# Altium PCB mainPCB.PcbDoc
Units mil, origin at the board's own origin, x right, y up, seen from the top; angles counter-clockwise.
Board outline 4245 x 925 mil, 4 copper layers (Top Layer, GND, Power, Bottom Layer), stack 23.756 mil thick; 69 components, 45 nets, 283 pads, 120 vias.
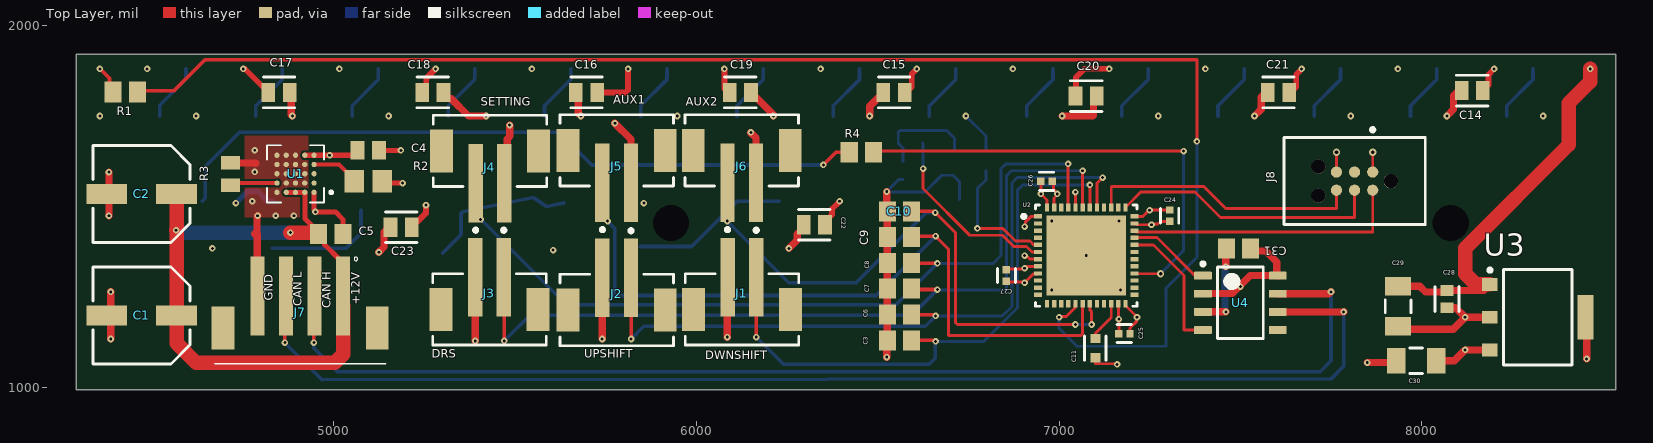
[diagram p0: Top Layer view]
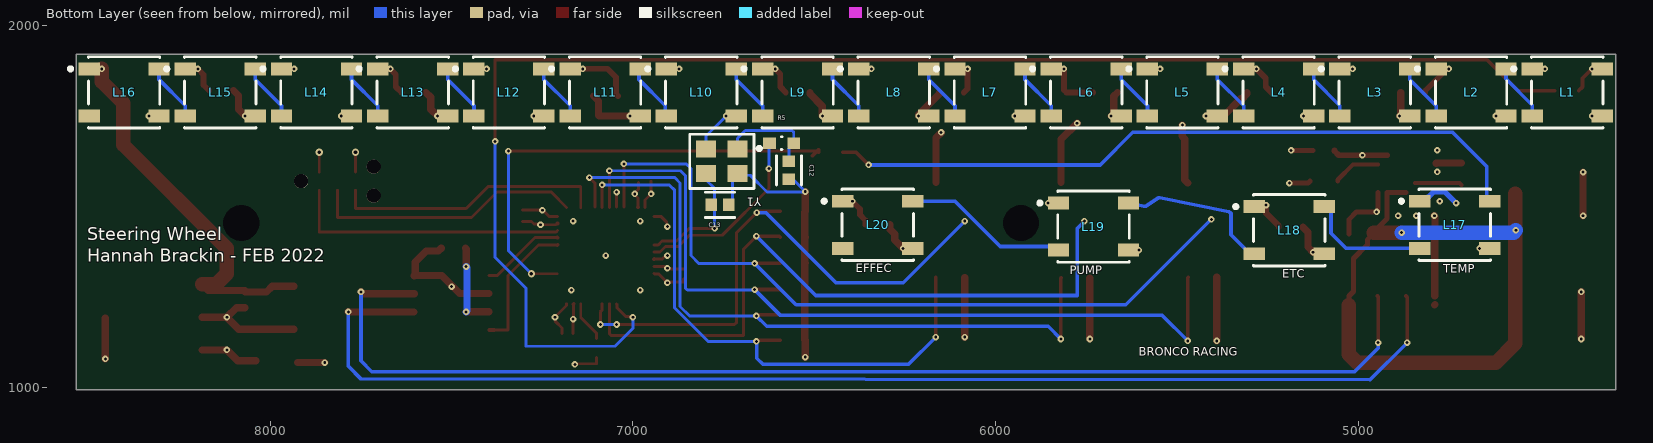
[diagram p1: Bottom Layer view, seen from below]
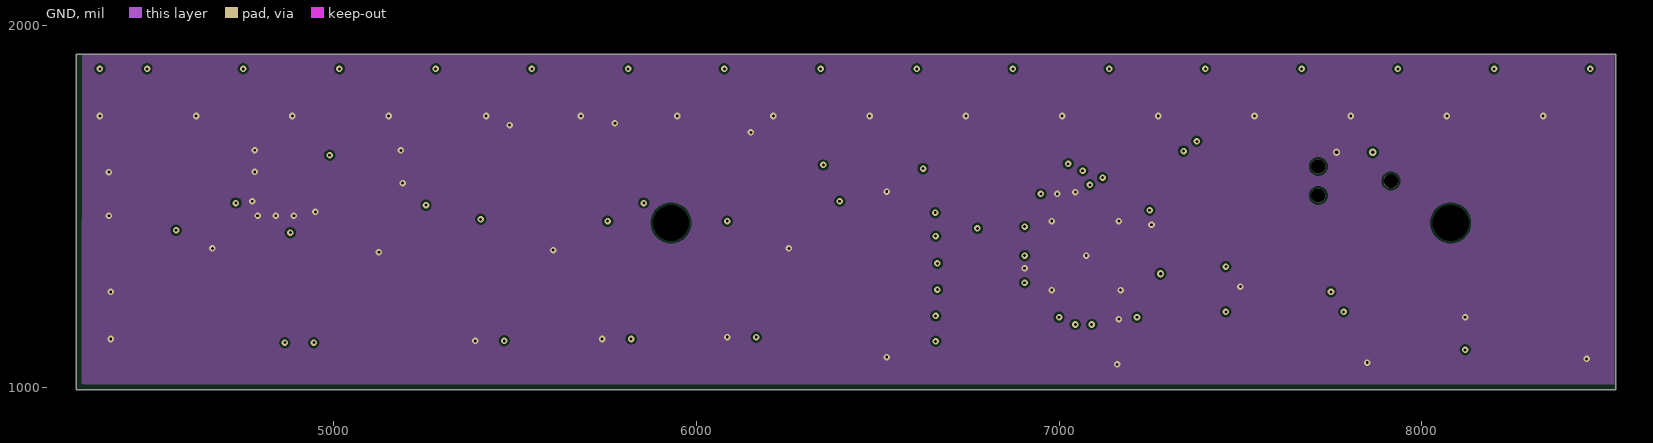
[diagram p2: GND]
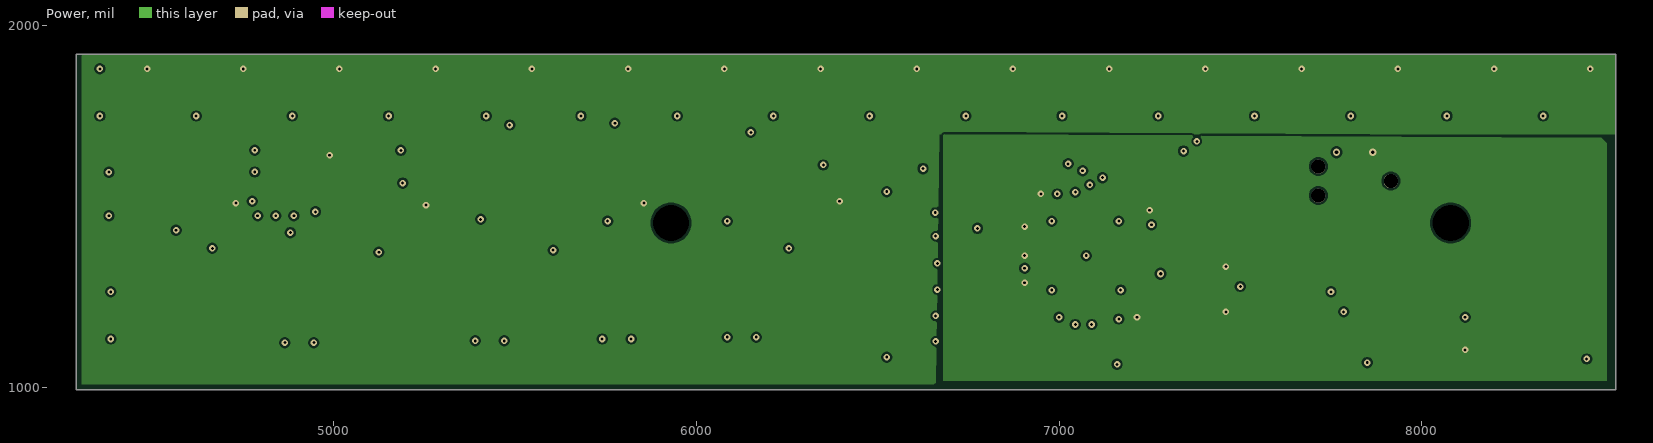
[diagram p3: Power]
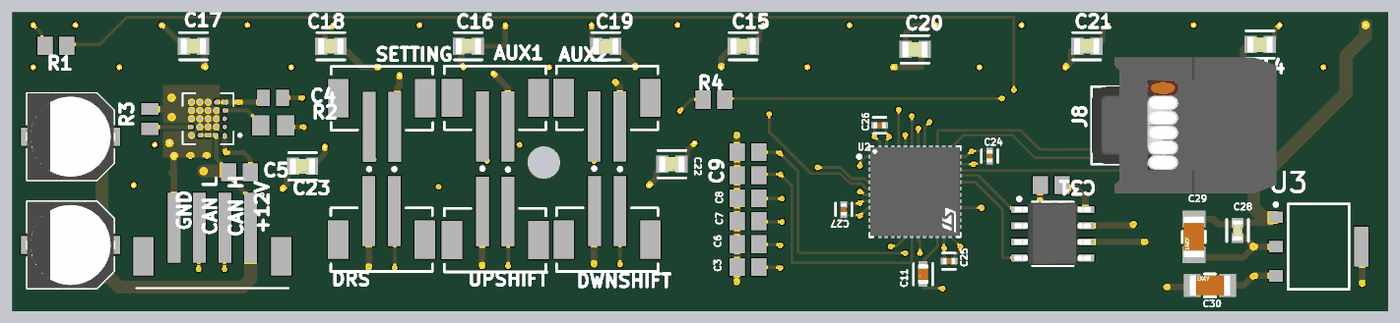
[diagram p4: 3D render of the assembled board from above, using the file's embedded part models]
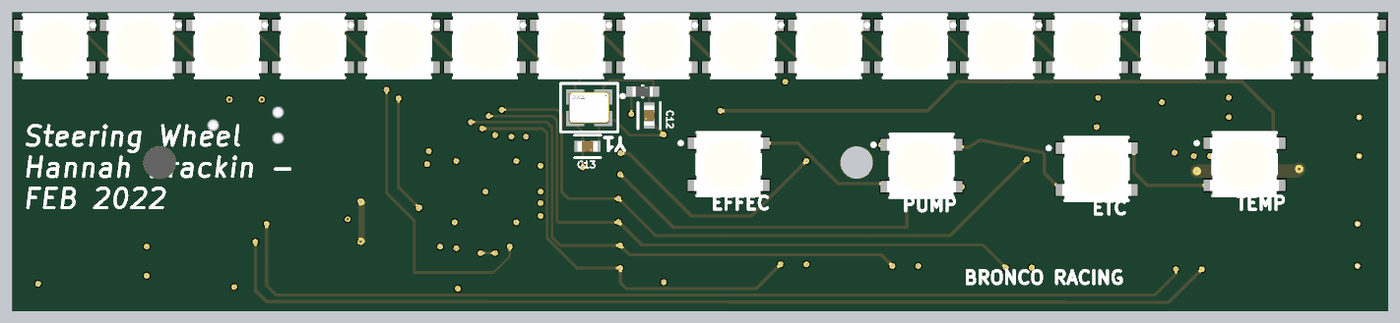
[diagram p5: 3D render of the assembled board from below, using the file's embedded part models]

## Layer stack, top to bottom
Top Solder: solder mask 0.4, Solder Resist, Dk 3.5
Top Layer: signal copper 1.4
Dielectric 2: prepreg 2.8, PP-006, Dk 4.1
GND: signal copper 1.378
Dielectric 1: dielectric 12.6, FR-4, Dk 4.8
Power: signal copper 1.378
Dielectric 3: prepreg 2.8, PP-006, Dk 4.1
Bottom Layer: signal copper 1.4
Bottom Solder: solder mask 0.4, Solder Resist, Dk 3.5

## Board outline
6805,995 8535,995 8535,1705 8535,1920 4290,1920 4290,1710 4290,995

## Design rules (kind name [scope] priority, off if disabled: settings)
Clearance [All] p1: gap=6 ignorepadtopadclearanceinfootprint=TRUE except(0: Arc-Hole Track-Hole SMDPad-Hole THPad-Hole Via-Hole Fill-Hole Poly-Hole Region-Hole Text-Hole; 5: Arc-SMDPad Track-SMDPad; 7: SMDPad-SMDPad)
ComponentClearance TeensyClearance [HasFootprint('Teensy3_2')] p1: gap=0 collisioncheckmode=3 verticalgap=0 showdistances=FALSE
ComponentClearance [All] p2: gap=10 collisioncheckmode=3 verticalgap=10 showdistances=FALSE
PlaneClearance [All] p1: clearance=10
PolygonConnect [HasFootprint('*BGA25C65P5X5_400X400X198N_LTM8074IY#PBF(Primary)')] p1: connectstyle=Direct reliefconductorwidth=10 reliefentries=4 polygonreliefangle="90 Angle" airgapwidth=10
PolygonConnect PolygonConnect_1 [All] p2: thpad.connectstyle=Relief thpad.reliefconductorwidth=10 thpad.reliefentries=4 thpad.polygonreliefangle="90 Angle" thpad.airgapwidth=10 smdpad.connectstyle=Relief smdpad.reliefconductorwidth=10 smdpad.reliefentries=4 smdpad.polygonreliefangle="90 Angle" smdpad.airgapwidth=10 via.connectstyle=Direct via.reliefconductorwidth=10 via.reliefentries=4 via.polygonreliefangle="90 Angle" via.airgapwidth=10
RoutingVias [All] p1: holewidth=10 width=20 viastyle="Through Hole" minholewidth=8 minwidth=18 maxholewidth=100 maxwidth=100
SolderMaskExpansion [All] p1: expansion=4 istentingtop=FALSE
Width [All] p1: maxlimit=100 minlimit=4 preferedwidth=10 midlayer1_minwidth=10 midlayer2_minwidth=10 minimp=50.000000 maximp=50.000000 favimp=50.000000
28 further rules are at their usual default settings.

## Components (designator, comment, footprint, x,y, rotation, side; value= is the part's Value field where it differs from the comment)
C1 "EEE-FK1H220P" PNSC-EEE-FK1H220P_L 4470,1200 r180 top
C2 "EEE-FK1H220P" PNSC-EEE-FK1H220P_L 4470,1535 r180 top
C3 "GRM216R61E105KA12D" CAPC2013X70X45NL10T25 6560,1131.41 r180 top
C4 "GRM21BR61C106KE15L" CAPC2013X135X50LL10T20 5095,1655 r0 top
C5 "GRM216R61E105KA12D" CAPC2013X70X45NL10T25 4991.54,1425 r0 top
C6 "GRM216R61E105KA12D" CAPC2013X70X45NL10T25 6560,1202.5 r180 top
C7 "GRM216R61E105KA12D" CAPC2013X70X45NL10T25 6560,1273.59 r180 top
C8 "GRM216R61E105KA12D" CAPC2013X70X45NL10T25 6560,1344.69 r180 top
C9 "GRM216R61E105KA12D" CAPC2013X70X45NL10T25 6560,1415.78 r180 top
C10 "GRM216R61E105KA12D" CAPC2013X70X45NL10T25 6560,1486.87 r180 top
C11 "2.2uF" FP-GRM188-0_1-e0_2_0_5-MFG 7100,1110 r270 top
C12 "10p" FP-0603-L_1_6_0_15-W_0_81-IPC_C 6570,1600 r270 bottom
C13 "10p" FP-0603-L_1_6_0_15-W_0_81-IPC_C 6760,1505 r180 bottom
C14 "C0805C104K5RACTU" FP-C0805C-DN-MFG 8139.53,1820 r180 top value="0.10 μF"
C15 "C0805C104K5RACTU" FP-C0805C-DN-MFG 6545,1815 r180 top value="0.10 μF"
C16 "C0805C104K5RACTU" FP-C0805C-DN-MFG 5697,1815 r180 top value="0.10 μF"
C17 "C0805C104K5RACTU" FP-C0805C-DN-MFG 4849,1815 r0 top value="0.10 μF"
C18 "C0805C104K5RACTU" FP-C0805C-DN-MFG 5273,1815 r0 top value="0.10 μF"
C19 "C0805C104K5RACTU" FP-C0805C-DN-MFG 6121,1815 r0 top value="0.10 μF"
C20 "C0805C104K5RACTU" FP-C0805C-DN-MFG 7075,1805 r0 top value="0.10 μF"
C21 "C0805C104K5RACTU" FP-C0805C-DN-MFG 7605,1815 r180 top value="0.10 μF"
C22 "C0805C104K5RACTU" FP-C0805C-DN-MFG 6325,1450 r180 top value="0.10 μF"
C23 "C0805C104K5RACTU" FP-C0805C-DN-MFG 5185.83,1443.2 r180 top value="0.10 μF"
C24 "C0402C104K8PACTU" FP-C0402-BB-MFG 7305,1475 r270 top value="0.10 μF"
C25 "C0402C104K8PACTU" FP-C0402-BB-MFG 7180,1150 r180 top value="0.10 μF"
C26 "C0402C104K8PACTU" FP-C0402-BB-MFG 6965.75,1570 r0 top value="0.10 μF"
C27 "C0402C104K8PACTU" FP-C0402-BB-MFG 6855,1310 r90 top value="0.10 μF"
C28 "0.1u" FP-C0603C-CF-MFG 8070,1245 r270 top value="0.10 μF"
C29 "1206YD106KAT2A" FP-1206-L_3_2_0_2-W_1_6_0-IPC_B 7935,1225 r270 top
C30 "1206YD106KAT2A" FP-1206-L_3_2_0_2-W_1_6_0-IPC_B 7985,1075 r180 top
C31 "GRM216R61E105KA12D" CAPC2013X70X45NL10T25 7495,1385 r0 top
J1 "B2B-PH-SM4-TB(LF)(SN)" JST-B2B-PH-SM4-TB-2_V 6125.63,1216.42 r0 top
J2 "B2B-PH-SM4-TB(LF)(SN)" JST-B2B-PH-SM4-TB-2_V 5780,1215 r0 top
J3 "B2B-PH-SM4-TB(LF)(SN)" JST-B2B-PH-SM4-TB-2_V 5429.37,1216.42 r0 top
J4 "B2B-PH-SM4-TB(LF)(SN)" JST-B2B-PH-SM4-TB-2_V 5430.63,1653.58 r180 top
J5 "B2B-PH-SM4-TB(LF)(SN)" JST-B2B-PH-SM4-TB-2_V 5780,1655 r180 top
J6 "B2B-PH-SM4-TB(LF)(SN)" JST-B2B-PH-SM4-TB-2_V 6125,1655 r180 top
J7 "B4B-PH-SM4-TB" *JST_B4B-PH-SM4-TB 4907.4,1253.56 r180 top
J8 "TC2030-CTX-NL" Tag_Connect_0_MFG 7815,1570.31 r180 top
L1 "1655" ADA-RGB-1655_V 4423.43,1815 r180 bottom locked
L2 "1655" ADA-RGB-1655_V 4688.76,1815 r180 bottom locked
L3 "1655" ADA-RGB-1655_V 4954.09,1815 r180 bottom locked
L4 "1655" ADA-RGB-1655_V 5219.42,1815 r180 bottom locked
L5 "1655" ADA-RGB-1655_V 5484.76,1815 r180 bottom locked
L6 "1655" ADA-RGB-1655_V 5750.09,1815 r180 bottom locked
L7 "1655" ADA-RGB-1655_V 6015.42,1815 r180 bottom locked
L8 "1655" ADA-RGB-1655_V 6280.76,1815 r180 bottom locked
L9 "1655" ADA-RGB-1655_V 6546.09,1815 r180 bottom locked
L10 "1655" ADA-RGB-1655_V 6811.42,1815 r180 bottom locked
L11 "1655" ADA-RGB-1655_V 7076.76,1815 r180 bottom locked
L12 "1655" ADA-RGB-1655_V 7342.09,1815 r180 bottom locked
L13 "1655" ADA-RGB-1655_V 7607.42,1815 r180 bottom locked
L14 "1655" ADA-RGB-1655_V 7872.75,1815 r180 bottom locked
L15 "1655" ADA-RGB-1655_V 8138.09,1815 r180 bottom locked
L16 "1655" ADA-RGB-1655_V 8403.42,1815 r180 bottom locked
L17 "1655" ADA-RGB-1655_V 4733.43,1450 r180 bottom
L18 "1655" ADA-RGB-1655_V 5190,1435 r180 bottom
L19 "1655" ADA-RGB-1655_V 5730,1445 r180 bottom
L20 "1655" ADA-RGB-1655_V 6325,1450 r180 bottom
R1 "ERA6AEB201V" RESC2013X60X40NL20T25 4425,1815.98 r180 top
R2 "ERJ-6ENF4532V" RESC2013X70X40ML20T20 5095,1570 r0 top
R3 "ERJ-6ENF4122V" RESC2013X70X40LL20T20 4715,1590 r90 top
R4 "ERA6AEB201V" RESC2013X60X40NL20T25 6455,1650 r180 top
R5 "0R" FP-RC0603-MFG 6590,1675 r180 bottom value=0Ω
U1 "LTM8074IY#PBF" *BGA25C65P5X5_400X400X198N_LTM8074IY#PBF(Primary) 4894.41,1590.59 r180 top
U2 "STM32F412CGU6" FP-UFQFPN48-A0B9-MFG 7075,1365 r0 top
U3 "LT1129IST-3.3#PBF" LT-ST-3-SOT-223_L 8320,1195 r0 top
U4 "SN65HVD230DR" D0008A_L 7500,1234.69 r0 top
Y1 "24MHz" FP-7M-MFG 6755,1625 r0 bottom

## Footprints (in the part's own frame and the unit in brackets; to place one, negate y for a bottom-side part, rotate by r counter-clockwise, add the part's x,y. Pads: shape width x height; smd on the part's side, far side on the other; paste and mask are expansions set on the pad)
*BGA25C65P5X5_400X400X198N_LTM8074IY#PBF(Primary) [mm]
  round 0.37 smd: A1(-1.3,1.3) A2(-0.65,1.3) A3(0,1.3) A4(0.65,1.3) A5(1.3,1.3) B1(-1.3,0.65) B2(-0.65,0.65) B3(0,0.65) B4(0.65,0.65) B5(1.3,0.65) C1(-1.3,0) C2(-0.65,0) C3(0,0) C4(0.65,0) C5(1.3,0) D1(-1.3,-0.65) D2(-0.65,-0.65) D3(0,-0.65) D4(0.65,-0.65) D5(1.3,-0.65) E1(-1.3,-1.3) E2(-0.65,-1.3) E3(0,-1.3) E4(0.65,-1.3) E5(1.3,-1.3)
  silkscreen extent -2.6,-2 2,2
*JST_B4B-PH-SM4-TB [mm]
  rect 1x5.5 smd: 1(-3,0) 2(-1,0) 3(1,0) 4(3,0)
  rect 1.6x3 smd: P1(-5.4,2.25) P2(5.4,2.25)
  silkscreen extent -5.97,-2.73 5.97,4.75
ADA-RGB-1655_V [mm] "SMD, 4-Leads, Body 5x5mm"
  rect 1.5x0.9 smd: 1(-2.45,1.65) 2(-2.45,-1.65) 3(2.45,-1.65) 4(2.45,1.65)
  silkscreen extent -3.88,-2.5 2.5,2.5, body extent -2.7,-2.5 2.7,2.5, height 1.68
CAPC2013X70X45NL10T25 [mm] "Chip Capacitor, 2-Leads, Body 2.00x1.25mm, IPC Medium Density"
  rect 1.2x1.4 smd: 1(-0.85,0) 2(0.85,0)
  body extent -1.05,-0.67 1.05,0.67, height 0.7
CAPC2013X135X50LL10T20 [mm] "Chip Capacitor, 2-Leads, Body 2.00x1.25mm, IPC High Density"
  rect 1x1.3 smd: 1(-0.75,0) 2(0.75,0)
  body extent -1.05,-0.67 1.05,0.68, height 1.35
D0008A_L [mm] "SOIC, 8-Leads, Body 5x4mm, Pitch 1.27mm, IPC High Density"
  rrect18% 1.25x0.55 smd: 1(-2.625,1.905) 2(-2.625,0.635) 3(-2.625,-0.635) 4(-2.625,-1.905) 5(2.625,-1.905) 6(2.625,-0.635) 7(2.625,0.635) 8(2.625,1.905)
  silkscreen extent -2.75,-2.5 1.6,2.85, body extent -3,-2.45 3,2.45, height 1.63
FP-7M-MFG [mm]
  rect 1.4x1.2 smd paste+0 mask+0: 1(-1.1,-0.85) 2(1.1,-0.85) 3(1.1,0.85) 4(-1.1,0.85)
  silkscreen extent -2.75,-1.9 2.25,1.9, body extent -1.6,-1.25 1.6,1.25, height 0.8
FP-0603-L_1_6_0_15-W_0_81-IPC_C [mil]
  rect 31.75x34.18 smd paste+0 mask+0: 1(-24.64,0) 2(24.64,0)
  silkscreen extent -41,-35 41,35, body extent -31,-16 31,16, height 35
FP-1206-L_3_2_0_2-W_1_6_0-IPC_B [mil]
  rect 51.36x71.11 smd paste+0 mask+0: 1(-55.15,0) 2(55.15,0)
  silkscreen extent -18,-36 18,36, body extent -91,-45 91,45, height 10
FP-C0402-BB-MFG [mm]
  rect 0.52x0.52 smd paste+0 mask+0: 1(-0.4,0) 2(0.4,0)
  silkscreen extent -0.5,-0.64 0.5,0.63, body extent -0.8,-0.4 0.8,0.4, height 0.25
FP-C0603C-CF-MFG [mm]
  rect 0.75x0.9 smd paste+0 mask+0: 1(-0.6,0) 2(0.6,0)
  silkscreen extent -0.87,-0.85 0.88,0.85, body extent -1.2,-0.6 1.2,0.6, height 0.25
FP-C0805C-DN-MFG [mm]
  rect 0.95x1.35 smd paste+0 mask+0: 1(-0.75,0) 2(0.75,0)
  silkscreen extent -1.1,-1.07 1.1,1.07, body extent -1.4,-0.85 1.4,0.85, height 0.25
FP-GRM188-0_1-e0_2_0_5-MFG [mm]
  rect 0.65x0.7 smd paste+0 mask+0: 1(-0.675,0) 2(0.675,0)
  silkscreen extent -0.85,-0.75 0.85,0.75, body extent -1.1,-0.55 1.1,0.55, height 0.25
FP-RC0603-MFG [mm]
  rect 0.9x0.8 smd paste+0 mask+0: 1(-0.85,0) 2(0.85,0)
  silkscreen extent -0.03,-0.45 0.03,0.45, body extent -0.8,-0.4 0.8,0.4, height 0.55
FP-UFQFPN48-A0B9-MFG [mm]
  rect 0.55x0.3 smd paste+0 mask+0: 1(-3.375,2.75) 2(-3.375,2.25) 3(-3.375,1.75) 4(-3.375,1.25) 5(-3.375,0.75) 6(-3.375,0.25) 7(-3.375,-0.25) 8(-3.375,-0.75) 9(-3.375,-1.25) 10(-3.375,-1.75) 11(-3.375,-2.25) 12(-3.375,-2.75) 25(3.375,-2.75) 26(3.375,-2.25) 27(3.375,-1.75) 28(3.375,-1.25) 29(3.375,-0.75) 30(3.375,-0.25) 31(3.375,0.25) 32(3.375,0.75) 33(3.375,1.25) 34(3.375,1.75) 35(3.375,2.25) 36(3.375,2.75)
  rect 0.3x0.55 smd paste+0 mask+0: 13(-2.75,-3.375) 14(-2.25,-3.375) 15(-1.75,-3.375) 16(-1.25,-3.375) 17(-0.75,-3.375) 18(-0.25,-3.375) 19(0.25,-3.375) 20(0.75,-3.375) 21(1.25,-3.375) 22(1.75,-3.375) 23(2.25,-3.375) 24(2.75,-3.375) 37(2.75,3.375) 38(2.25,3.375) 39(1.75,3.375) 40(1.25,3.375) 41(0.75,3.375) 42(0.25,3.375) 43(-0.25,3.375) 44(-0.75,3.375) 45(-1.25,3.375) 46(-1.75,3.375) 47(-2.25,3.375) 48(-2.75,3.375)
  rect 5.6x5.6 smd paste+0 mask+0: 49(0,0)
  silkscreen extent -4.5,-3.55 3.55,3.55, body extent -3.75,-3.75 3.75,3.75, height 0.25
JST-B2B-PH-SM4-TB-2_V [mm] "SMD, 2-Leads, Body 7.95x5mm, Pitch 2mm"
  rect 1x5.5 smd: 1(1,2.25) 2(-1,2.25)
  rect 1.6x3 smd: MP1(3.4,0) MP2(-3.4,0)
  silkscreen extent -3.98,-2.5 3.98,5.67, body extent -3.97,-2.5 3.97,4.5, height 6.6
LT-ST-3-SOT-223_L [mm] "SOT223, 4-Leads, Body 6.505x3.505mm, Pitch 2.3mm, IPC High Density"
  rect 1.1x0.9 smd: 1(-3.35,2.3) 2(-3.35,0) 3(-3.35,-2.3)
  rect 1.1x3.15 smd: 4(3.35,0)
  silkscreen extent -3.47,-3.35 2.4,3.42, body extent -1.86,-3.35 1.86,3.35, height 1.8
PNSC-EEE-FK1H220P_L [mm] "CAPAE, 2-Leads, Base 6.6x6.6mm, IPC High Density"
  rect 2.85x1.4 smd: 1(-2.45,0) 2(2.45,0)
  silkscreen extent -3.4,-3.4 3.4,3.4, body extent -3.5,-3.4 3.5,3.4, height 6.1
RESC2013X60X40NL20T25 [mm] "Chip Resistor, 2-Leads, Body 2.00x1.25mm, IPC Medium Density"
  rect 1.2x1.45 smd: 1(-0.85,0) 2(0.85,0)
  body extent -1.1,-0.72 1.1,0.72, height 0.6
RESC2013X70X40LL20T20 [mm] "Chip Resistor, 2-Leads, Body 2.00x1.25mm, IPC High Density"
  rect 0.95x1.35 smd: 1(-0.775,0) 2(0.775,0)
  body extent -1.1,-0.72 1.1,0.72, height 0.7
RESC2013X70X40ML20T20 [mm] "Chip Resistor, 2-Leads, Body 2.00x1.25mm, IPC Low Density"
  rect 1.35x1.55 smd: 1(-0.975,0) 2(0.975,0)
  body extent -1.1,-0.72 1.1,0.72, height 0.7
Tag_Connect_0_MFG [mil]
  round 30.98 smd paste-39370.1 mask+0: 1(-50,-25) 2(-50,25) 3(0,-25) 4(0,25) 5(50,-25) 6(50,25)
  round 39.02 hole 39.02 unplated paste-39370.1 mask+0: ""(-100,0) ""(100,-40) ""(100,40)
  silkscreen extent -195,-147 195,120, body extent -199,-124 199,124, height 10

## Part data
C1 C2: library part CMP-2000-06209-1, "Cap Aluminum Lytic, 22 uF, +/- 20%, 6.3 to 100 V, -55 to 105 degC, 2-Pin SMD, RoHS, Tape and Reel", Capacitance=22µF, Case Size/Dimension=Ø6.3x5.8mm, Lifetime@Temperature=2000Hrs@105°C, Manufacturer=Panasonic, Operating Temp Range=-55to+105°C, Operating Temp-Max=105°C, Package Description="2-Pin Aluminum Electrolytic Capacitor, Base 6.6 x 6.6 mm, Height 6.10 mm", Rated Voltage=50V, Ripple Current=165mA, Datasheet URL=http://www.mouser.com/ds/2/315/ABA0000CE120-68386.pdf, Datasheet Version=03/2014, Impedance=0.88O, Manufacturer URL=http://www.panasonic.com/, Mounting Technology=SurfaceMount, Package Reference=EEE-FK1H220P, Series=FK, Type=Can
C3 C5 C6 C7 C8 C9 C10 C31: library part CMP-2007-00957-1, Manufacturer=Murata, Part Number=GRM216R61E105KA12D
C4: library part CMP-2007-03453-1, Manufacturer=Murata, Part Number=GRM21BR61C106KE15L
C11: library part CMP-2006-02836-2, "Chip Multilayer Ceramic Capacitors for General Purpose, 0603, 2.2uF, X7R, 15%, 10%, 10V", Case Code (Imperial)=0603, Case Code (Metric)=1608, Dielectric=X7R, Max Operating Temperature=125°C, Min Operating Temperature=-55°C, Package Quantity=1, Tolerance=10%, Voltage=10V, Capacitance=2.2uF, Case/Package=0603, Depth=0.8mm, Height=0.8mm, Lead Free="Lead Free", Length=1.6mm, Material=Ceramic, Mount="Surface Mount", Number of Pins=2, Packaging="Cut Tape", REACH SVHC="No SVHC", Termination=SMD/SMT, Thickness=0.035inch, Voltage Rating=10V, Voltage Rating (DC)=10V, Weight=7.1E-05oz, Width=0.031inch
C12 C13: library part CMP-2006-04216-2, "General Purpose Ceramic Capacitor, 0603, 10pF, 10%, NP0, 30ppm/°C, 50V", Capacitance=10pF, Case Code (Imperial)=0603, Case Code (Metric)=1608, Dielectric=C0G, Max Operating Temperature=125°C, Min Operating Temperature=-55°C, Package Quantity=1, Tolerance=10%, Voltage=50V, Case/Package=0603, Construction=Flat, Contact Plating=Tin, Depth=0.81mm, Lead Free="Lead Free", Length=1.6mm, Mount="Surface Mount", Number of Pins=2, Packaging="Tape and Reel", Radiation Hardening=No, REACH SVHC="No SVHC", RoHS Compliant=Yes, Series=-, Termination=SMD/SMT, Thickness=0.035inch, Voltage Rating=50V, Voltage Rating (DC)=50V, Width=0.032inch
C14 C15 C16 C17 C18 C19 C20 C21 C22 C23: library part CMP-2007-00279-2, "CAP CER 0.1UF 50V X7R 0805", Capacitance="0.10 μF", Manufacturer=KEMET, Package=C0805C-DN, Temperature="-55°C to +125°C", Temperature Characteristic=X7R, Temperature Coefficient=30ppm/°C, Temperature Range High=+125°C, Temperature Range Low=-55°C, Tolerance=0.1, Voltage Rating="50 V", Automotive=No, Category=Cap, ComponentLink2Description=Datasheet, ComponentLink2URL=https://content.kemet.com/datasheets/KEM_C1003_C0G_SMD.pdf, Device Class L1="Passive Components", Device Class L2=Capacitors, Device Class L3="Ceramic Capacitors", Digikey Description="CAP CER 0.1UF 50V X7R 0805", Height=0.88mm, Ipc Land Pattern Name=CAPC200125X78, Lead Free=Yes, Manufacturer Part Number=C0805C104K5RACTU, Material=Ceramic, Mouser Description="Cap Ceramic 0.1uF 50V X7R 10% SMD 2.0 x 1.2 mm 125 C Paper T/R", Octopart=https://octopart.com/c0805c104k5ractu-kemet-143926, RoHS=TRUE
C24 C25 C26 C27: library part CMP-2008-02046-2, "CAP CER 0.1UF 10V X5R 0402", Capacitance="0.10 μF", Manufacturer=Kemet, Package=C0402-BB, Temperature="-55°C to +125°C", Temperature Characteristic=X5R, Temperature Coefficient=15%, Temperature Range High=+125°C, Temperature Range Low=-55°C, Tolerance=0.1, Voltage Rating="10 V", Automotive=No, Category=Cap, ComponentLink2Description=Datasheet, ComponentLink2URL=https://content.kemet.com/datasheets/KEM_C1002_X7R_SMD.pdf, Device Class L1="Passive Components", Device Class L2=Capacitors, Device Class L3="Ceramic Capacitors", Digikey Description="CAP CER 0.1UF 10V X5R 0402", Height=0.55mm, Ipc Land Pattern Name=CAPC10050X50, Lead Free=Yes, Manufacturer Part Number=C0402C104K8PACTU, Material=Ceramic, Mouser Description="Capacitor 100 nF 10 VDC 0402", Octopart=https://octopart.com/c0402c104k8pactu-kemet-140039, RoHS=TRUE
C28: library part CMP-2006-03061-2, "CAP CER 0.1UF 50V X7R 0603", Capacitance="0.10 μF", Manufacturer=KEMET, Manufacturer Part Number=C0603C104K5RACTU, Package=C0603C-CF, Temperature="-55°C to +125°C", Temperature Characteristic=X7R, Temperature Coefficient=30ppm/°C, Temperature Range High=+125°C, Temperature Range Low=-55°C, Tolerance=0.1, Voltage Rating="50 V", Automotive=Yes, Automotive Grade="Grade 1", Category=Cap, ComponentLink2Description=Datasheet, ComponentLink2URL=https://api.kemet.com/component-edge/download/datasheet/C0603C100J5GACAUTO.pdf, Device Class L1="Passive Components", Device Class L2=Capacitors, Device Class L3="Ceramic Capacitors", Digikey Description="CAP CER 0.1UF 50V X7R 0603", Height=0.87mm, Lead Free=Yes, Material=Ceramic, Octopart=https://octopart.com/c0603c104k5ractu-kemet-139244, RoHS=TRUE
C29 C30: library part CMP-04427-000082-1, "General Purpose Ceramic Capacitor, 1206, 10uF, 10%, X5R, 15%, 16V", Capacitance=10uF, Case Code (Imperial)=1206, Case Code (Metric)=3216, Dielectric=X5R, Max Operating Temperature=85°C, Min Operating Temperature=-55°C, Package Quantity=1, Tolerance=10%, Voltage=16V, Case/Package=1206, Construction=Flat, Depth=1.6mm, Height=0.07mm, Lead Free="Lead Free", Length=3.2mm, Mount="Surface Mount", Number of Pins=2, Packaging="Tape and Reel", Radiation Hardening=No, REACH SVHC="No SVHC", RoHS Compliant=Yes, Series=-, Size=1.78mm, Termination=SMD/SMT, Thickness=0.07inch, Voltage Rating=16V, Voltage Rating (DC)=16V, Width=1.6mm
J1 J2 J3 J4 J5 J6: library part CMP-2000-05163-1, "Male Header, Pitch 2 mm, 1 x 2 Position, Height 6.6 mm, RoHS, Tape and Reel", Manufacturer=JST, Datasheet URL=https://ciiva.com/datasheet-click-26894756?src=ciiva&sig=90099765, Datasheet Version=Dec-12, Manufacturer URL=http://www.jst.com/home2.html, No of Positions=2, Pitch=2mm, Style/Orientation=StraightHeader/Plug, Termination=Crimp, Type=ShroudedHeader
J7: "Connector Header Surface Mount 4 position 0.079 _2.00mm_", Package=None, Availability=Unavailable, MF="JST Sales", MP=B4B-PH-SM4-TB, Price=None, SnapEDA_Link=https://www.snapeda.com/parts/B4B-PH-SM4-TB/JST%20Sales%20America%20Inc./view-part/48901/?ref=snap
L1 L2 L3 L4 L5 L6 L7 L8 L9 L10 L11 L12 L13 L14 L15 L16 L17 L18 L19 L20: library part CMP-2000-05026-1, "Intelligent Control LED Integrated Light Source, 3.5 to 5.3 V, -25 to 80 degC, 4-Pin SMD, RoHS, Tape and Reel", Color=Red,Green,Blue(RGB), Manufacturer=Adafruit-Industries-LLC, Package Description="4-Pin Surface Mount Device, Body 5 x 5 mm", Category=Optoelectronics, Configuration=Discrete, Controller Type=-, Datasheet URL=http://datasheet.octopart.com/ADA1655-Adafruit-Industries-datasheet-32028139.pdf, Datasheet Version=May-13, Family=Addressable,Specialty, Interface=-, Manufacturer URL=https://www.adafruit.com/, Mounting Type=SurfaceMount, Number of LEDs=10, Package Reference=1655, Series=Neopixel, Size / Dimension=5.00mmLx5.00mmW, Utilized LED=WS2812(5050)
R1 R4: library part CMP-2001-00608-1, Manufacturer=Panasonic, Part Number=ERA6AEB201V
R2: library part CMP-2001-00193-1, Manufacturer=Panasonic, Part Number=ERJ-6ENF4532V
R3: library part CMP-2001-00174-1, Manufacturer=Panasonic, Part Number=ERJ-6ENF4122V
R5: library part CMP-2000-06925-2, "RES SMD 0 OHM JUMPER 1/10W 0603", Manufacturer=Yageo, Manufacturer Part Number=RC0603FR-070RL, Package=RC0603, Power Rating=0.1W, Resistance=0Ω, Temperature="-55°C to +155°C", Temperature Range High=+155°C, Temperature Range Low=-55°C, Tolerance=1%, Voltage Rating=75V, Automotive=No, Category=Res, ComponentLink2Description=Datasheet, ComponentLink2URL=http://www.yageo.com/documents/recent/PYu-RC_Group_51_RoHS_L_10.pdf, Composition="Thick Film", Device Class L1="Passive Components", Device Class L2=Resistors, Device Class L3="Chip SMD Resistors", Digikey Description="RES SMD 0 OHM JUMPER 1/10W 0603", Footprint Url=http://www.yageo.com/exep/pages/download/literatures/PYu-R_Mount_10.pdf, Height=0.55mm, Ipc Land Pattern Name=RESC16080X45, Lead Free=Yes, Mouser Description="RC Series 0603 0.1 W 0 O Jumper Surface Mount Thick Film Chip Resistor", Octopart=https://octopart.com/rc0603fr-070rl-yageo-1180803, RoHS=TRUE, Series=RC_L
U1: "40Vin, 0.7A Step Dwn uModule Reg", Package="BGA -25 Analog Devices", Availability=Unavailable, MF="Analog Devices", MP=LTM8074IY#PBF, Price=None, SnapEDA_Link=https://www.snapeda.com/parts/LTM8074IY%23PBF/Analog%20Devices/view-part/4335081/?ref=snap
U2: library part CMP-12105-000086-1, "IC MCU 32BIT 1MB FLASH 48UFQFPN", Frequency=100MHz, Max Operating Temperature=85°C, Min Operating Temperature=-40°C, Core Architecture=ARM, Interface=I2C, Memory Size=1MB, Memory Type=FLASH, Number of I/Os=36, Oscillator Type=Internal, Peripherals="Brown-out Detect/Reset"
U3: library part CMP-0476-01834-1, "Micropower Low Dropout Regulator with Shutdown, 4.15 to 30 V Vin, 3.3 V Vout, 3-pin SOT223 (ST-3), -40 to 125 degC, Pb-Free", Dropout Voltage(V)=0.45, Manufacturer="Linear Technology", Output Voltage="3.3 V", Shutdown Current(uA)=16, ComponentLink1Description="Manufacturer URL", ComponentLink1URL=http://www.linear.com/, ComponentLink2Description=Datasheet, ComponentLink2URL=http://cds.linear.com/docs/en/datasheet/112935ff.pdf, ComponentLink3Description="Package Specification", ComponentLink3URL=http://cds.linear.com/docs/en/packaging/SOT_3_05-08-1630.pdf, DatasheetVersion="Rev. F", Discrete Pass Element=no, Iout(mA)=700, Isupply(mA)=0.05, Mounting Technology="Surface Mount", Number of Outputs=1, PackageDescription="3-Pin Plastic SOT-223, 3.505 x 6.505 mm Body, Pitch 2.3 mm", PackageReference=ST-3, PackageVersion=Jun-10, PartNumber=LT1129IST-3.3#PBF, PSRR(dB)=64, RoHS=TRUE, Vin Max(V)=30, Vin Min(V)=4.15
U4: library part CMP-0315-00015-2, "3.3V CAN Transceiver with Standby Mode, 17 mA, -40 to 85 degC, 8-pin SOIC (D), Green (RoHS & no Sb/Br)", Drivers Per Package=1, Low Power Mode=Standby, Manufacturer="Texas Instruments", Rating=Catalog, Supply Voltage(s)(V)=3.3, Code_JEDEC=MS-012AA, ComponentLink1Description=Datasheet, ComponentLink1URL=http://www.ti.com/general/docs/lit/getliterature.tsp?genericPartNumber=SN65HVD230&fileType=pdf, DatasheetVersion=SLOS346K, Eco-Plan="Green (RoHS & no Sb/Br)", ICC(Max)(mA)=17, Isolated=No, Mounting Technology="Surface Mount", PackageDescription="8-Pin Plastic Small Outline Integrated Circuit, 4.9 x 3.9 mm, Pitch 1.27 mm Pitch", PackageReference=D0008A, PackageVersion="revM, Jun-2011", PartNumber=SN65HVD230DR, Receivers Per Package=1, SubFamily=CAN, Transient Pulse Protection(V)="-25 to 25"
Y1: library part CMP-18717-000318-1, "Crystal 24MHz, 10ppm, 10pF, 50Ω", Case/Package=SMD/SMT, ESR (Equivalent Series Resistance)=60R, Frequency Stability=10ppm, Load Capacitance=10pF, Max Operating Temperature=70°C, Min Operating Temperature=-20°C, Package Quantity=3000, Depth=2.5mm, Frequency=24MHz, Frequency Tolerance=10ppm, Height=0.031inch, Lead Free="Lead Free", Length=3.2mm, Mount="Surface Mount", Number of Pins=4, Packaging="Tape and Reel", REACH SVHC="No SVHC", Series=7M, Termination=SMD/SMT, Tolerance=10ppm, Width=0.098inch

## Free pads (board coordinates)
  round 60 hole 100: 2(5930,1455) 2(8080,1455)

## Via types
v1: diameter 18, hole 8, Top Layer to Bottom Layer, 117 vias
v2: diameter 20, hole 10, Top Layer to Bottom Layer, 3 vias

## Nets (pads, with @x,y where several pads share a name; then routed paths per layer and width w, separated by ;. In a path a pad name is that pad's centre, name@x,y a point inside that pad or via, vN(x,y) a via of type N, cw(c..) or ccw(c..) an arc to the next point about the centre after c; other vN are vias at no path point)
3V3: C24.1 C25.1 C26.1 C27.1 C30.1 C31.1 J8.1 U2.1 U2.7 U2.9 U2.24 U2.36 U2.48 U3.3 U4.3 | length 940.3
  Top Layer w8: C27.1@6860.75,1300 6860.75,1292.4 6861.24,1291.91 6903.09,1291.91 v1(6905,1290) 6928.88,1313.88 6940.22,1313.88 U2.9 ; v1(6905,1365) 6910,1365 6919.84,1355.16 U2.7 ; v1(6905,1445) 6906.85,1446.85 6906.85,1456.85 6923.27,1473.27 U2.1 ; C26.1 v1(6950,1535) 6966.73,1518.27 U2.48 ; U2.24 7183.27,1227.2 7215,1195.47 v1(7215,1195) 7213.09,1193.09 7213.09,1182.34 7195.75,1165 C25.1 ; U2.36 7212.8,1473.27 7231.38,1473.27 7248.11,1490 v1(7250,1490) 7250.37,1490.37 7304.63,1490.37 C24.1 ; J8.1 v2(7865,1650)
  Top Layer w10: U2.7@6941.22,1356.06 U2.7 ; U3.3@8187.56,1105 U3.3
  Top Layer w20: U4.3@7397.15,1210.18 v1@7459.51,1210.18 ; v1(7460,1334.69) 7460,1383.46 C31.1 ; C30.1 8090,1075 v1(8120,1105) U3.3@8187.56,1105
  Bottom Layer w20: v1(7460,1209.69) 7457.34,1212.34 7457.34,1332.03 v1(7460,1334.69)
+5: C4.1 C14.1 C15.1 C16.1 C17.1 C18.1 C19.1 C20.1 C21.1 C22.1 C23.1 C28.1 C29.1 L1.1 L2.1 L3.1 L4.1 L5.1 L6.1 L7.1 L8.1 L9.1 L10.1 L11.1 L12.1 L13.1 L14.1 L15.1 L16.1 L17.1 L18.1 L19.1 L20.1 U1.E1 U1.E2 U3.1 | length 2257.5
  Top Layer w16: v1(4750.33,1880) 4750.72,1879.62 4754.85,1879.62 4815.54,1818.94 C17.1@4815.54,1815 ; U1.E2 U1.E1 v1(4988.41,1641.77) 5053.79,1641.77 5065.47,1653.46 C4.1 ; C23.1@5219.29,1443.2 5219.29,1447.14 5253.91,1481.75 5253.91,1503.81 v1(5254.29,1504.19) ; C18.1@5239.54,1815 5255.16,1830.62 5255.16,1854.16 v1(5281,1880) ; C16.1@5730.46,1815 5804.74,1815 5811.28,1821.55 5811.28,1879.62 v1(5811.67,1880) ; v1(6077,1880) 6077.38,1879.62 6077.38,1825.15 C19.1@6087.54,1815 ; C22.1@6358.46,1450 6358.46,1461.81 6374.09,1477.43 6374.09,1493.55 6395,1514.46 v1(6395,1515) ; C15.1@6578.46,1815 6594.09,1830.62 6594.09,1865.88 6607.67,1879.46 v1(6607.67,1880) ; C20.1@7041.54,1805 7046.56,1810.02 7046.56,1856.56 7070,1880 v1(7138.33,1880) ; C21.1@7638.46,1815 7654.09,1830.62 7654.09,1864.55 7669,1879.46 v1(7669,1880) ; C14.1@8168.46,1820 8184.09,1835.62 8184.09,1863.88 8199.67,1879.46 v1(8199.67,1880)
  Top Layer w20: C29.1 7994.85,1280.15 8010.31,1264.68 C28.1@8070,1264.68 ; C28.1 8171.18,1268.62 U3.1
  Top Layer w40: U3.1 8149.45,1285.55 8120,1315 8120,1385 8405,1670 8405,1785.08 8465,1845.08 v1(8465,1880)
  Bottom Layer w16: v1(4730,1510) 4762,1542 4791.03,1542 4818.07,1514.96 L17.1
  other v1: 5855,1510 4485,1880 5015.67,1880 5546.33,1880 6342.33,1880 6873,1880 7403.67,1880 7934.33,1880
+12: C1.1 C2.1 C5.1 J7.1 U1.A2 U1.A3 U1.A4 | length 1839.8
  Top Layer w14: U1.A4 U1.A3 U1.A2 4920,1467.01 4958.07,1428.94 C5.1 4974.69,1408.38 4974.69,1394.93 5012.83,1356.8 5012.83,1266.25 J7.1 J7.1@5025.51,1228.56
  Top Layer w40: C2.1 4566.46,1436.46 v1(4565,1435) 4566.46,1433.54 4566.46,1123.54 4620,1070 5002.08,1070 5025.51,1093.43 J7.1@5025.51,1228.56 ; v1(4880.33,1428.44) C5.1@4957.58,1428.44
  Bottom Layer w40: v1(4565,1435) 4571.56,1428.44 v1(4880.33,1428.44)
AUX2_BTN: C10.1 J6.1 U2.19 | length 1554.2
  Top Layer w8: v1(6658.6,1483.59) 6715,1427.19 6715,1179.69 6719.69,1175 v1(7045,1175) ; U2.19 7084.84,1215.16 7090,1210 v1(7090,1175)
  Top Layer w10: C10.1 6654.24,1486.87 6657.52,1483.59 v1(6658.6,1483.59)
  Bottom Layer w8: v1(7045,1175) v1(7090,1175)
  Bottom Layer w10: v1(6085,1460) 6255,1290 6440,1290 6633.59,1483.59 v1(6658.6,1483.59)
CANH: J7.2 U4.7 | length 3327.5
  Top Layer w10: v1(4945,1125) 4945,1251.79 J7.2
  Top Layer w20: U4.7 7744.69,1259.69 v1(7750,1265)
  Bottom Layer w10: v1(4945,1125) 4945,1110 5010,1045 7720,1045 7750,1075 v1(7750,1265)
CANL: J7.3 U4.6 | length 3437.3
  Top Layer w10: v1(4865,1125) 4865,1250.53 J7.3
  Top Layer w20: U4.6@7604.33,1209.69 7784.69,1209.69 v1(7785,1210)
  Bottom Layer w10: v1(4865,1125) 4967.5,1022.5 7750,1024.87 7784.69,1059.56 v1@7784.69,1209.69
CANRXD: U2.32 U4.4 | length 388.6
  Top Layer w8: U2.32 7260.47,1394.53 7345,1310 7345,1160 7345.31,1159.69 U4.4
  Top Layer w10: U2.32 U2.32@7208.54,1393.86 ; U4.4@7382.87,1159.69 U4.4
CANTXD: U2.33 U4.1 | length 233
  Top Layer w8: U2.33@7208.27,1414.61 7270.39,1414.61 7375.31,1309.69 U4.1
  Top Layer w10: U2.33 U2.33@7208.66,1415
DOWNSHIFT_BTN: C3.1 J1.1 U2.42 | length 1667
  Top Layer w8: U2.42@7084.92,1498.11 7084.92,1559.92 v1(7085,1560)
  Top Layer w10: v1(6165,1140) J1.1 ; C3.1 6654.71,1131.41 6657.52,1128.59 v1(6659.69,1128.59)
  Bottom Layer w8: v1(6659.69,1128.59) 6793.39,1128.59 6885,1220.2 6885,1545.31 6899.69,1560 v1(7085,1560)
  Bottom Layer w10: v1(6165,1140) 6240,1065 6641.42,1065 6658.6,1082.18 v1@6658.6,1128.59
DRS_BTN: C7.1 J3.1 U2.43 | length 2320.4
  Top Layer w8: U2.43@7065,1498.03 v1(7065,1599)
  Top Layer w10: J3.1 5470,1303.74 v1(5470,1130) ; C7.1 6595.65,1271.41 v1(6664.71,1271.41)
  Bottom Layer w8: v1@6664.71,1270 6850.12,1270 6854.8,1274.69 6854.8,1585.31 6868.49,1599 v1(7065,1599)
  Bottom Layer w10: v1(5470,1130) 5540,1200 6593.3,1200 v1(6664.71,1271.41)
GND: C1.2 C2.2 C3.2 C4.2 C5.2 C6.2 C7.2 C8.2 C9.2 C10.2 C11.2 C12.2 C13.2 C14.2 C15.2 C16.2 C17.2 C18.2 C19.2 C20.2 C21.2 C22.2 C23.2 C24.2 C25.2 C26.2 C27.2 C28.2 C29.2 C30.2 C31.2 J1.2 J2.2 J3.2 J4.2 J5.2 J6.2 J7.4 J8.5 L1.3 L2.3 L3.3 L4.3 L5.3 L6.3 L7.3 L8.3 L9.3 L10.3 L11.3 L12.3 L13.3 L14.3 L15.3 L16.3 L17.3 L18.3 L19.3 L20.3 R2.2 R3.2 U1.A1 U1.A5 U1.B2 U1.B3 U1.B4 U1.C2 U1.C3 U1.C4 U1.C5 U1.D2 U1.D3 U1.D4 U1.D5 U1.E3 U1.E4 U1.E5 U2.8 U2.23 U2.35 U2.44 U2.47 U2.49 U3.2 U3.4 U4.2 U4.8 Y1.2 Y1.4 | length 5067.6
  Top Layer w8: C27.2@6855.67,1327.48 6856.28,1328.09 6903.09,1328.09 v1(6905,1330) 6907.71,1330 6913.18,1335.47 U2.8 ; U2.47@6985,1499.29 6986.42,1500.71 6986.42,1523.71 6995,1532.29 v1(6995,1535) 6995,1537.71 6984.94,1547.76 6984.94,1566.44 C26.2@6985,1566.5 ; v1(7045,1540) 7045.24,1539.76 U2.44@7045.24,1498.58 ; C11.2 7100,1066.69 v1@7158.31,1066.69 ; C25.2@7165,1150 v1(7165,1190) 7164.29,1190.71 7164.29,1230 U2.23@7165,1230.71 ; U2.35@7213.27,1450 v1(7255,1450) 7256.91,1451.91 7272.66,1451.91 7280,1459.25 C24.2 ; J8.5 v2(7765,1650)
  Top Layer w10: 5484.69,1694.63 5485,1694.94 ; J2.2@5740,1302.95 J2.2 ; J1.2@6085,1303.74 J1.2 ; v1@6150,1704.06 v1(6150,1705) ; U2.47@6985.51,1498.78 U2.47 ; U2.23 U2.23@7164.49,1231.22 ; U2.35 U2.35@7208.78,1454.49 ; U3.4 U3.4@8455,1191.89
  Top Layer w14: U1.A1 4945.59,1490.49 4949.41,1486.67 v1(4949.41,1485.59) 5004.41,1485.59 5025,1465 C5.2 ; C4.2 v1(5185,1655) ; R2.2 5138.39,1565 v1(5190,1565)
  Top Layer w20: v1(4380,1475) v1(4380,1595) ; v1(4385,1135) v1(4385,1265) ; R3.2 4784.49,1620.51 4785,1620 ; 4781.54,1425 4782.91,1423.62 ; J7.4@4787.91,1229.94 J7.4@4789.29,1228.56 ; J7.4 4788.68,1254.17 4788.68,1424.39 4788.07,1425 4788.07,1473.07 v1(4790,1475) ; C17.2@4882.46,1815 4882.46,1753.2 v1(4885.67,1750) ; v1(5124.29,1374.19) 5138.74,1388.64 5138.74,1429.58 C23.2@5152.36,1443.2 ; C18.2@5306.46,1815 5306.46,1811.06 5320.09,1797.44 5324.02,1797.44 5371.46,1750 v1(5420,1750) ; v1(5390,1130) J3.2 ; J4.2 5478.58,1573.58 5478.58,1686.8 5484.69,1692.91 ; 5485,1694.94 v1(5485,1725) ; C16.2@5663.54,1815 5674.23,1804.31 5674.23,1757.44 v1(5681.67,1750) ; v1(5740,1135) J2.2@5740,1302.95 ; v1(5775,1730) 5819.37,1685.63 J5.2 ; v1(6085,1140) J1.2@6085,1303.74 ; v1@6150,1704.06 6164.37,1689.68 J6.2 ; C19.2@6154.46,1815 6154.46,1811.06 6212.33,1753.19 v1(6212.33,1750) ; v1(6255,1385) 6277.91,1407.91 6277.91,1424.57 6291.54,1438.19 C22.2@6291.54,1450 ; v1(6477.67,1750) 6477.67,1777.19 6511.54,1811.06 C15.2@6511.54,1815 ; v1(6525,1085) 6525,1131.41 6526.54,1132.94 6526.54,1200.96 6525,1202.5 6526.54,1204.03 6526.54,1272.06 6525,1273.59 6526.54,1275.13 6526.54,1343.15 6525,1344.69 6526.54,1346.22 6526.54,1414.24 6525,1415.78 6526.54,1417.31 6526.54,1485.34 6525,1486.87 v1(6525,1541.41) ; v1(7008.33,1750) 7093.28,1750 7094.84,1751.56 7094.84,1791.38 C20.2@7108.46,1805 ; U4.2@7397.15,1260.18 7477.34,1260.18 7496.85,1279.69 v1(7500,1279.69) 7500,1282.84 7527.34,1310.18 U4.8@7602.85,1310.18 ; C31.2@7528.96,1385.49 7536.99,1377.46 7570.37,1377.46 7600.69,1347.15 ; v1(7539,1750) 7557.91,1768.91 7557.91,1801.38 C21.2@7571.54,1815 ; 7600.69,1346.83 7600.69,1310.51 7602.52,1310.51 U4.8 ; v1(7850,1070) C30.2@7924.85,1070 ; C29.2@7935,1162.01 8087.01,1162.01 v1(8120,1195) ; v1(8069.67,1750) 8087.91,1768.25 8087.91,1806.38 C14.2@8101.54,1820 ; C28.2 8093.62,1221.38 v1(8120,1195) ; U3.2 v1(8120,1195) ; v1(8455,1080) U3.4@8455,1191.89
  Bottom Layer w8: v1@6525,1540 6630.16,1540 6676.82,1586.66 6707.46,1586.66 6725.36,1568.76 C13.2@6725.36,1520 ; v1(6525,1541.41) 6558.95,1575.36 C12.2 ; v1(6743,1750) 6798.31,1694.69 Y1.2
  other v1: 7160,1065 6980,1270 7170,1270 7075,1365 5605,1380 4665,1385 6980,1460 7165,1460 4840,1475 4890,1475 4775,1515 4781.93,1595.59 4781.93,1655.59 4355,1750 4620.33,1750 5151,1750 5947,1750 7273.67,1750 7804.33,1750 8335,1750
LAUNCH_BTN: C9.1 J5.1 U2.18 | length 1975.3
  Top Layer w8: v1@6658.6,1418.59 v1@6659.14,1418.59 ; v1(6659.69,1418.59) v1@6659.14,1418.59 ; U2.18 7065.16,1150.16 7060,1145 6695,1145 6695,1382.74 v1@6659.14,1418.59
  Top Layer w10: C9.1 6596.28,1418.59 v1@6658.6,1418.59
  Bottom Layer w10: v1(5755,1460) 5775,1440 5775,1255 6495.55,1255 v1@6659.14,1418.59
LED_DRIVE: R1.1 U2.17 | length 4193.8
  Top Layer w8: v1(7000,1195) 7001.91,1196.91 7020.04,1196.91 7043.57,1220.45 7043.57,1230.22 U2.17@7045,1231.65 ; v1(7380,1680) 7380,1905
  Top Layer w10: R1.1@4458.46,1820 4560,1820 4645,1905 7380,1905
  Bottom Layer w8: v1(7000,1195) 7000,1164.69 7049.69,1115 7295,1115 7295,1275 7380,1360 v1(7380,1680)
LED_DRIVE2: R4.1 U2.28 | length 1320.5
  Top Layer w8: R4.1@6488.46,1653.27 v1(7343.27,1653.27) ; U2.28@7208.66,1315 v2(7280,1315)
  Top Layer w10: R4.1 6488.46,1656.54 R4.1@6505,1640
  Bottom Layer w8: v2(7280,1315) 7343.27,1378.27 v1(7343.27,1653.27)
NetC11_1: C11.1 U2.22 | length 113.7
  Top Layer w8: C11.1 7100,1150 7143.9,1193.9 U2.22
NetC12_1: C12.1 R5.2 Y1.1 | length 282.3
  Bottom Layer w8: C12.1 6570,1661.54 R5.2 6556.54,1705.31 6561.22,1710 6690.16,1710 6711.69,1688.46 Y1.1
NetC13_1: C13.1 U2.5 Y1.3 | length 355.9
  Top Layer w8: v1(6775,1440) 6845,1440 6880,1405 6920,1405 6930.47,1394.53 U2.5
  Bottom Layer w8: v1(6775,1440) 6775,1519.64 6774.64,1520 6774.64,1549.64 6798.31,1573.31 Y1.3 Y1.3@6798.31,1600
NetL1_2: L1.2 L2.4 | length 159.9
  Bottom Layer w10: L1.2 4519.88,1779.88 4592.3,1852.3 L2.4
NetL1_4: L1.4 R1.2 | length 75.1
  Top Layer w10: v1(4355,1880) 4381.33,1853.67 4381.33,1830.21 R1.2@4391.54,1820
NetL2_2: L2.2 L3.4 | length 159.9
  Bottom Layer w10: L2.2 4785.21,1778.21 4857.63,1850.63 L3.4
NetL3_2: L3.2 L4.4 | length 159.9
  Bottom Layer w10: L3.2 5050.55,1778.21 5122.97,1850.63 L4.4
NetL4_2: L4.2 L5.4 | length 159.9
  Bottom Layer w10: L4.2 5315.88,1778.21 5388.3,1850.63 L5.4
NetL5_2: L5.2 L6.4 | length 159.9
  Bottom Layer w10: L5.2@5580.88,1750.04 5580.88,1778.21 5653.3,1850.63 L6.4@5653.3,1879.96
NetL6_2: L6.2 L7.4 | length 159.9
  Bottom Layer w10: L6.2 5846.55,1778.21 5918.97,1850.63 L7.4
NetL7_2: L7.2 L8.4 | length 159.9
  Bottom Layer w10: L7.2 6111.88,1778.21 6184.3,1850.63 L8.4
NetL8_2: L8.2 L9.4 | length 159.9
  Bottom Layer w10: L8.2 6377.21,1778.21 6449.63,1850.63 L9.4
NetL9_2: L9.2 L10.4 | length 159.9
  Bottom Layer w10: L9.2 6642.55,1778.21 6714.97,1850.63 L10.4
NetL10_2: L10.2 L11.4 | length 159.9
  Bottom Layer w10: L10.2@6910.88,1750.04 6910.88,1778.21 6983.3,1850.63 L11.4@6983.3,1879.96
NetL11_2: L11.2 L12.4 | length 159.9
  Bottom Layer w10: L11.2 7173.21,1778.21 7245.63,1850.63 L12.4
NetL12_2: L12.2 L13.4 | length 159.9
  Bottom Layer w10: L12.2 7438.54,1778.21 7510.96,1850.63 L13.4
NetL13_2: L13.2 L14.4 | length 159.9
  Bottom Layer w10: L13.2 7703.88,1778.21 7776.3,1850.63 L14.4
NetL14_2: L14.2 L15.4 | length 159.9
  Bottom Layer w10: L14.2 7969.21,1778.21 8041.63,1850.63 L15.4
NetL15_2: L15.2 L16.4 | length 159.9
  Bottom Layer w10: L15.2 8234.54,1778.21 8306.96,1850.63 L16.4
NetL17_2: L17.2 L18.4 | length 325.8
  Bottom Layer w10: L17.2 5033.55,1385.04 5075,1426.49 L18.4@5075,1490
NetL17_4: L17.4 R4.2 | length 1965.5
  Top Layer w10: v1(6350,1615) 6385,1650 R4.2@6421,1650
  Bottom Layer w10: L17.4 4645,1522.99 4645,1610 4740,1705 5621.51,1705 5711.51,1615 v1(6350,1615)
NetL18_2: L18.2 L19.4 | length 426.7
  Bottom Layer w10: L18.2@5300,1371.77 5350.83,1422.61 5350.83,1480.96 5353.76,1483.88 5355.9,1486.02 5546.91,1524.38 5550.93,1524.38 5585.79,1501.18 5589.81,1501.18 5590.78,1501.37 L19.4
NetL19_2: L19.2 L20.4 | length 435.3
  Bottom Layer w10: L19.2@5845,1390.04 5986.76,1390.04 6111.68,1514.96 L20.4
NetR2_1: R2.1 U1.D1 | length 132.5
  Top Layer w12: U1.D1 5014.37,1616.18 5056.61,1573.94 R2.1
NetR3_1: R3.1 U1.B5 | length 130.5
  Top Layer w12: R3.1 4720.51,1565 U1.B5
NetR5_1: R5.1 U2.6 | length 515.3
  Top Layer w8: v1(6625,1605) 6625,1550 6754,1421 6844.16,1421 6875.16,1390 6910,1390 6925.16,1374.84 U2.6
  Bottom Layer w8: R5.1 6625,1673.46 v1(6625,1605)
SWCLK: J8.4 U2.37 | length 753.5
  Top Layer w8: U2.37 7225.39,1540 7375,1540 7445,1470 7815,1470 J8.4
SWDIO: J8.2 U2.34 | length 774.1
  Top Layer w8: U2.34 7211.77,1430 7865,1430 J8.2
SWO: J8.6 U2.39 | length 752.7
  Top Layer w8: U2.39 7143.9,1553.9 7145,1555 7400,1555 7460,1495 7765,1495 J8.6
TC_ENABLE_BTN: C8.1 J4.1 U2.45 | length 2210.4
  Top Layer w8: U2.45@7025,1498.66 v1(7025,1618)
  Top Layer w10: C8.1 6594.56,1343.59 v1(6664.69,1343.59)
  Bottom Layer w8: v1(6664.69,1343.59) 6818.59,1343.59 6840,1365 6840,1605 6853,1618 v1(7025,1618)
  Bottom Layer w10: v1(5405,1465) 5640.93,1229.07 6550.17,1229.07 v1(6664.69,1343.59)
UPSHIFT_BTN: C6.1 J2.1 U2.41 | length 2008.1
  Top Layer w8: U2.41@7104.76,1498.58 7104.76,1564.76 v1(7120,1580)
  Top Layer w10: J2.1 5820,1302.95 v1(5820,1135) ; C6.1 6594.56,1201.41 6654.71,1201.41 6657.52,1198.59 v1(6659.69,1198.59)
  Bottom Layer w8: v1(6659.69,1198.59) 6843.59,1198.59 6870,1225 6870,1565.31 6884.69,1580 v1(7120,1580)
  Bottom Layer w10: v1(5820,1135) 5855,1170 6631.09,1170 v1(6659.69,1198.59)
pads on no net: J1.MP1 J1.MP2 J2.MP1 J2.MP2 J3.MP1 J3.MP2 J4.MP1 J4.MP2 J5.MP1 J5.MP2 J6.MP1 J6.MP2 J7.P1 J7.P2 J8. J8.3 L16.2 L20.2 U1.B1 U1.C1 U2.2 U2.3 U2.4 U2.10 U2.11 U2.12 U2.13 U2.14 U2.15 U2.16 U2.20 U2.21 U2.25 U2.26 U2.27 U2.29 U2.30 U2.31 U2.38 U2.40 U2.46 U4.5

## Polygon pours and split planes (outlines as drawn)
3V3 on Power "3V3_L03_P009" (solid, pour order 9): 6680,1700 6680,1020 8510,1020 8510,1675 8495,1690
+5 on Power "+5_L03_P010" (solid, pour order 10): 6660,1015 6655,1010 4305,1010 4305,1915 4300,1920 8530.7,1920 8535,1915.7 8535,1700 6670,1700
GND on Top Layer "GND_L01_P000" (solid, remove dead copper, pour order 0): 4930,1470.59 4754.41,1470.59 4754.41,1695 4930,1695
GND on GND "GND_L02_P011" (solid, pour order 11): 4306.53,1920 8530.7,1920 8530.7,1009.3 8530,1010 4305,1010

## Silkscreen, mask and mechanical layers (free items; w line width, h text height)
Top Overlay:
  text "AUX1" at 5770,1775.44 h40
  text "SETTING" at 5405,1770.44 h40
  text "AUX2" at 5970,1770.44 h40
  text "GND" at 4839.56,1240 h40 r90
  text "+12V" at 5080,1230 h40 r90
  text "CAN L" at 4919.56,1225 h40 r90
  text "CAN H" at 4999.56,1220 h40 r90
  text "DRS" at 5270,1075.44 h40
  text "UPSHIFT" at 5690,1075.44 h40
  text "DWNSHIFT" at 6025,1070.44 h40
Bottom Overlay:
  text "Steering Wheel / Hannah Brackin - FEB 2022" at 8505,1335 h60
  text "TEMP" at 4765,1310 h40
  text "EFFEC" at 6385,1310.44 h40
  text "PUMP" at 5795,1305.44 h40
  text "ETC" at 5210,1295.44 h40
  text "BRONCO RACING" at 5604.98,1080.23 h40
Mechanical 1:
  lines w10: 4270,1055 4290,995 ; 4270,1860 4290,1920 ; 4280,995 4300,995 ; 4280,1920 4300,1920 ; 4290,1206.58 4290,995 ; 4290,1708.42 4290,1920 ; 4310,1055 4290,995 ; 4310,1860 4290,1920
  text "925 (mil)" at 4325.99,1216.58 h60 r90

## Dimensions
4290,995 to 8535,995 on Mechanical 1